# Altium PCB Power_Box_V0.PcbDoc (part 2 of 4)
Units mm, origin at the board's own origin, x right, y up, seen from the top; angles counter-clockwise.
Board outline 145 x 110 mm, 2 copper layers (Top Layer, Bottom Layer); 400 components, 300 nets, 1205 pads, 270 vias.
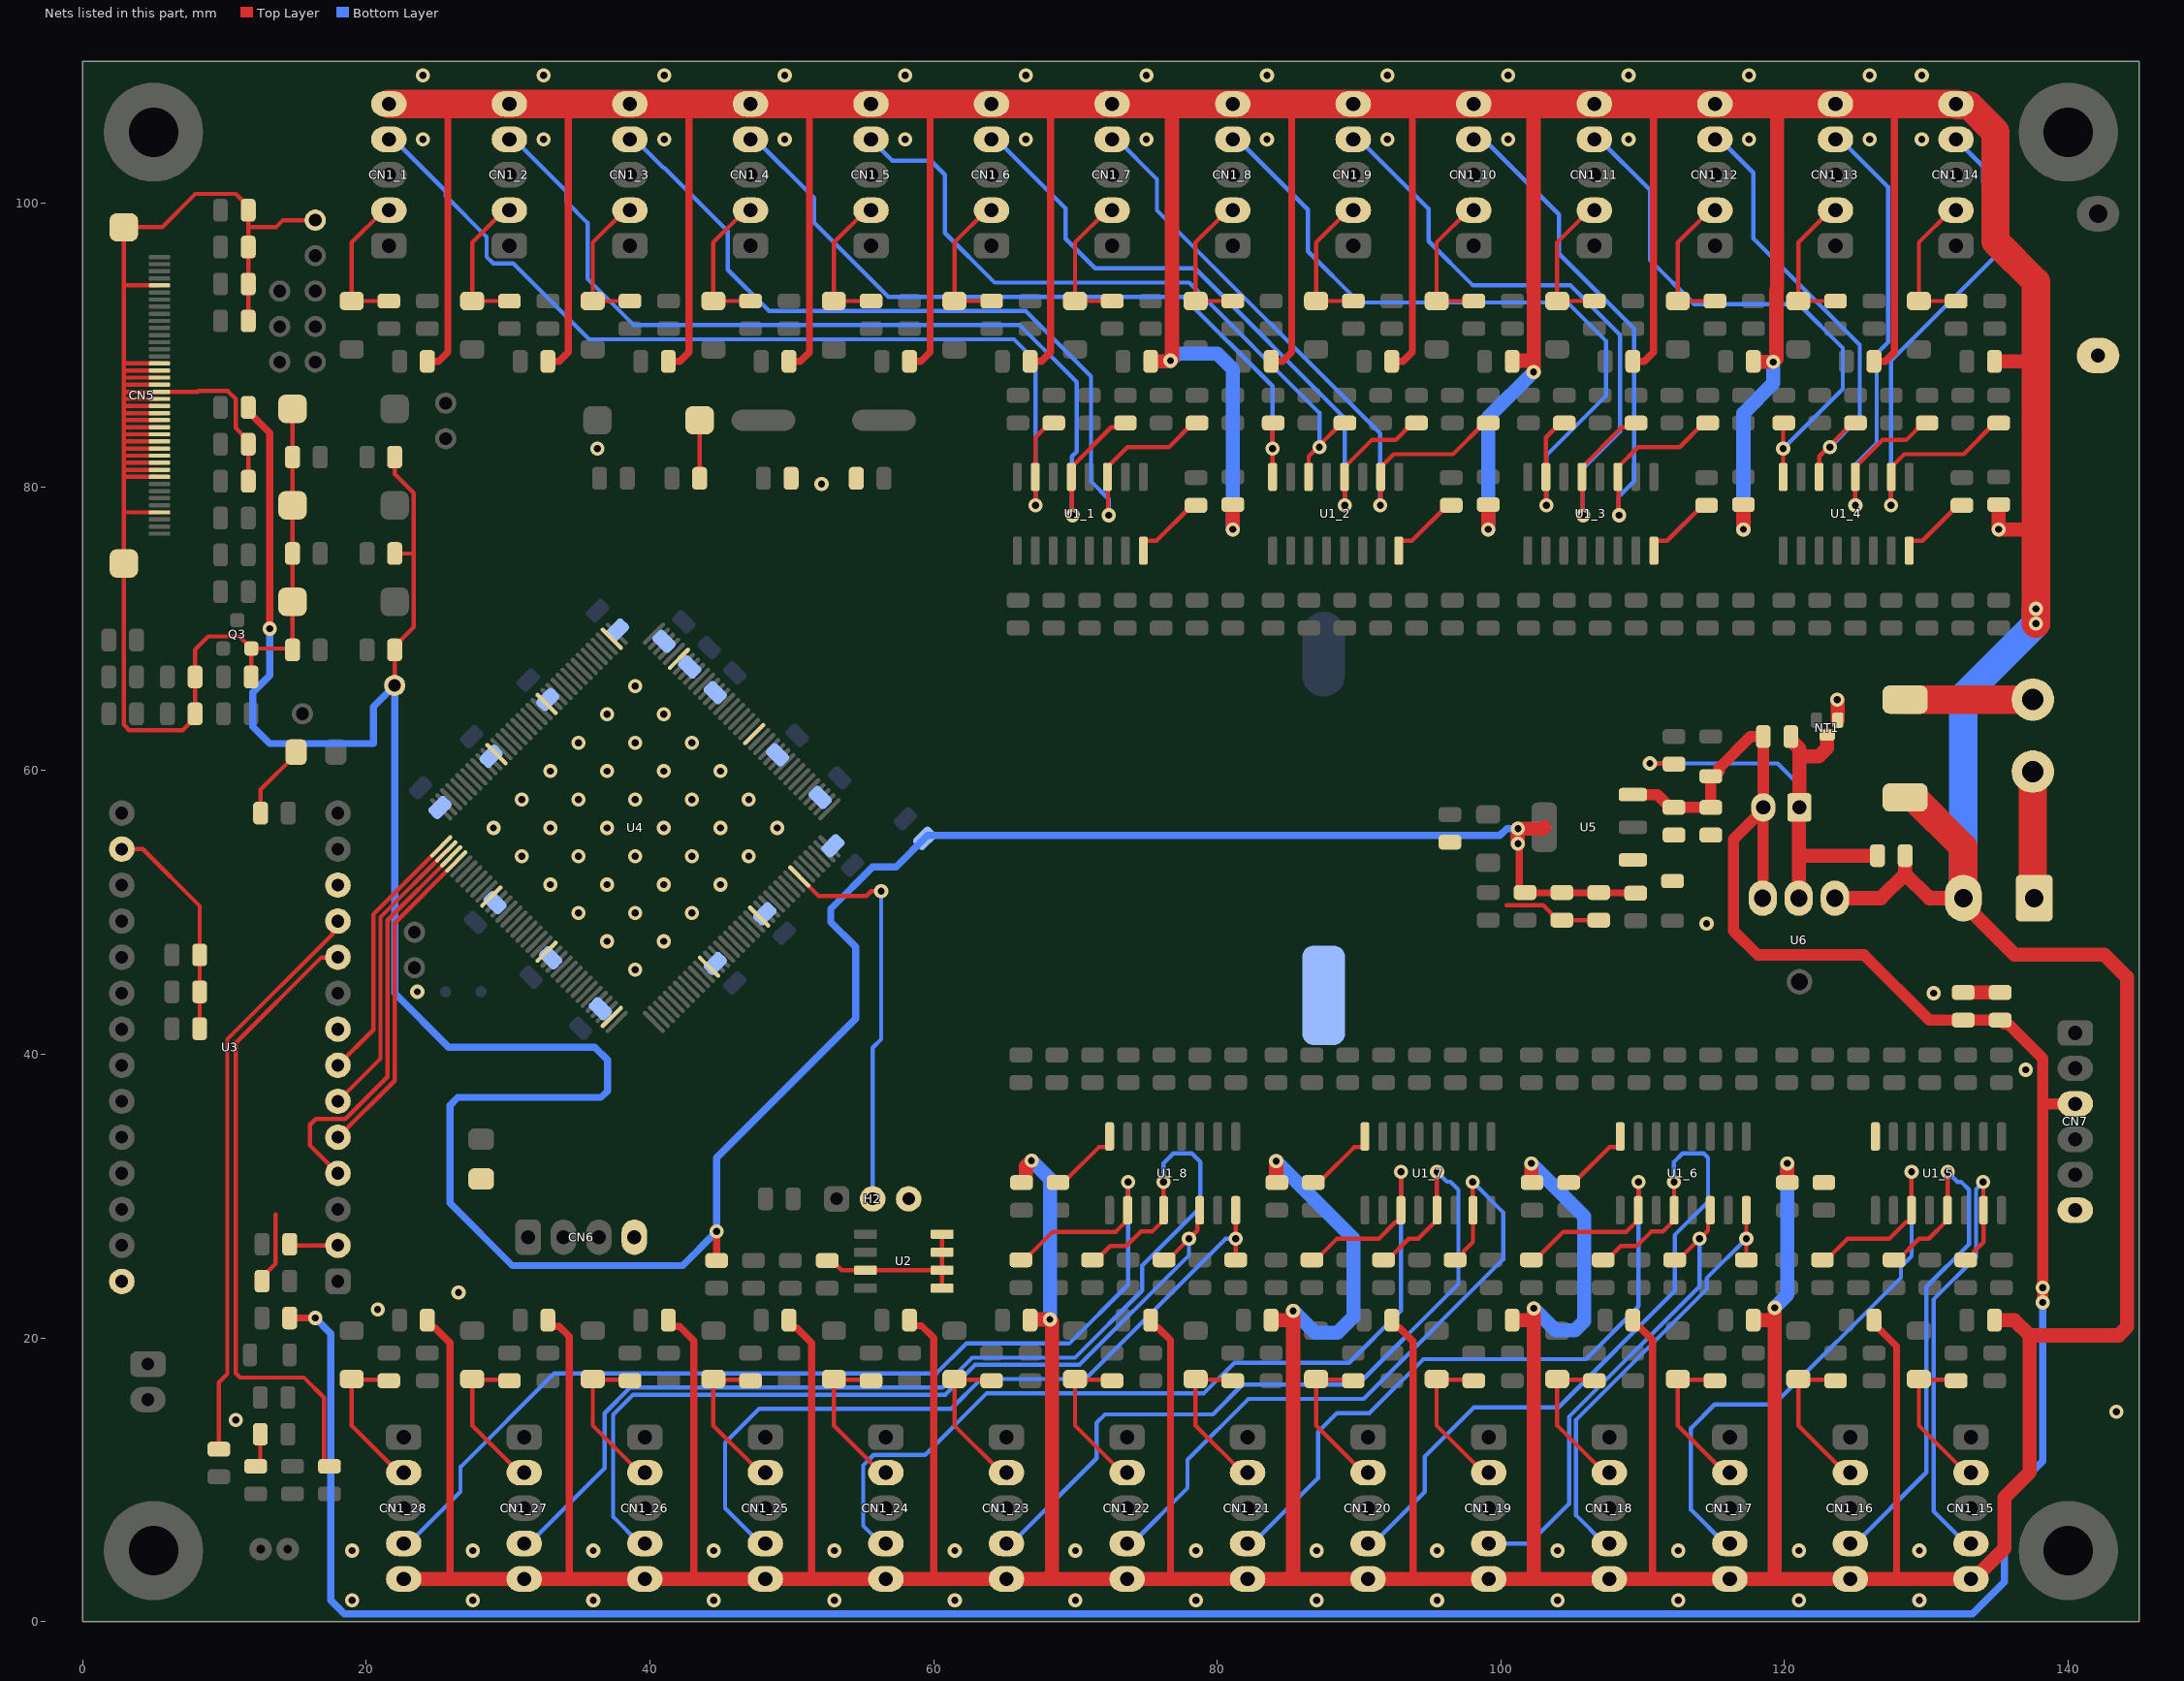
[diagram p2: the nets of this part, all layers, seen from the top]

## Components (designator, comment, footprint, x,y, rotation, side; value= is the part's Value field where it differs from the comment) (continued)
ZD1_21 "Zener -3.3V-SMD" SOD80 78.468,18.8 r270 top (schematic designator ZD1)
ZD1_22 "Zener -3.3V-SMD" SOD80 69.968,18.8 r270 top (schematic designator ZD1)
ZD1_23 "Zener -3.3V-SMD" SOD80 61.468,18.8 r270 top (schematic designator ZD1)
ZD1_24 "Zener -3.3V-SMD" SOD80 52.968,18.8 r270 top (schematic designator ZD1)
ZD1_25 "Zener -3.3V-SMD" SOD80 44.468,18.8 r270 top (schematic designator ZD1)
ZD1_26 "Zener -3.3V-SMD" SOD80 35.968,18.8 r270 top (schematic designator ZD1)
ZD1_27 "Zener -3.3V-SMD" SOD80 27.468,18.8 r270 top (schematic designator ZD1)
ZD1_28 "Zener -3.3V-SMD" SOD80 18.968,18.8 r270 top (schematic designator ZD1)

## Footprints (in the part's own frame and the unit in brackets; to place one, negate y for a bottom-side part, rotate by r counter-clockwise, add the part's x,y. Pads: shape width x height; smd on the part's side, far side on the other; paste and mask are expansions set on the pad)
BAT-HOLDER-SMD-3V [mm]
  oval 3x6 smd: 1(0,12.025)
  rrect50% 3x7 smd: 2(0,-12.025)
  silkscreen extent -10.81,-12.65 10.81,8.82, body extent -7.85,-12.87 7.85,12.52, height 5.4
C-0805 [mm]
  rrect50% 1.05x1.6 smd: 1(-0.975,0) 2(0.975,0)
  silkscreen extent -1.71,-1.01 1.71,1.01, body extent -1.03,-0.63 0.97,0.63, height 0.61
CAP-CER-13x5-Ls10 [mm] "P2P : 10mm"
  oval 2.5x3 hole 1.3: 1(-5,0)
  oval 2.5x3 hole 1: 2(5,0)
  silkscreen extent -6.47,-2.49 6.48,2.51, body extent -6,-2.5 6,2.5, height 15.98
CAP-Elec-6.3x12 [mm] "P2P : 2.54mm"
  oval 1.7x2 hole 1: 1(-1.27,0)
  rrect25% 1.7x2 hole 1: 2(1.27,0)
  silkscreen extent -3.3,-3.3 3.3,3.3, body extent -3.18,-3.15 3.13,3.15, height 12.71
CAP-Elec-10x25-5 [mm] "P2P : 5mm"
  oval 2.6x3.3 hole 1.3: 1(-2.5,0)
  rrect25% 2.6x3.3 hole 1.3: 2(2.5,0)
  silkscreen extent -5.19,-5.2 5.2,5.2, body extent -5,-5 5,5, height 25.2
CN-FPC-40-0.5mm-hor [mm]
  rrect50% 0.3x1.5 smd: 1(-9.75,1.258) 2(-9.25,1.258) 3(-8.75,1.258) 4(-8.25,1.258) 5(-7.75,1.258) 6(-7.25,1.258) 7(-6.75,1.258) 8(-6.25,1.258) 9(-5.75,1.258) 10(-5.25,1.258) 11(-4.75,1.258) 12(-4.25,1.258) 13(-3.75,1.258) 14(-3.25,1.258) 15(-2.75,1.258) 16(-2.25,1.258) 17(-1.75,1.258) 18(-1.25,1.258) 19(-0.75,1.258) 20(-0.25,1.258) 21(0.25,1.258) 22(0.75,1.258) 23(1.25,1.258) 24(1.75,1.258) 25(2.25,1.258) 26(2.75,1.258) 27(3.25,1.258) 28(3.75,1.258) 29(4.25,1.258) 30(4.75,1.258) 31(5.25,1.258) 32(5.75,1.258) 33(6.25,1.258) 34(6.75,1.258) 35(7.25,1.258) 36(7.75,1.258) 37(8.25,1.258) 38(8.75,1.258) 39(9.25,1.258) 40(9.75,1.258)
  rrect50% 2x2 smd: 41(-11.85,-1.257) 42(11.85,-1.257)
  silkscreen extent -12.7,-3.82 12.7,2.16, body extent -12.75,-3.86 12.75,1.54, height 2.12
CRYSTAL-SMD [mm]
  oval 4.5x1.5 smd: 1(-4.25,0) 2(4.25,0)
  silkscreen extent -5.75,-2.5 5.75,2.5, body extent -6.21,-2.25 6.09,2.25, height 5.18
D-DO214 [mm]
  rrect50% 2x3.2 smd: 1(3.425,0) 2(-3.475,0)
  silkscreen extent -4.72,-3.3 4.68,3.3, body extent -4.06,-3.15 4.06,3.15
DIP28-wide [mm]
  rrect50% 1.8x1.8 hole 0.9: 1(-7.62,16.51)
  round 1.8 hole 0.9: 2(-7.62,13.97) 3(-7.62,11.43) 4(-7.62,8.89) 5(-7.62,6.35) 6(-7.62,3.81) 7(-7.62,1.27) 8(-7.62,-1.27) 9(-7.62,-3.81) 10(-7.62,-6.35) 11(-7.62,-8.89) 12(-7.62,-11.43) 13(-7.62,-13.97) 14(-7.62,-16.51) 15(7.62,-16.51) 16(7.62,-13.97) 17(7.62,-11.43) 18(7.62,-8.89) 19(7.62,-6.35) 20(7.62,-3.81) 21(7.62,-1.27) 22(7.62,1.27) 23(7.62,3.81) 24(7.62,6.35) 25(7.62,8.89) 26(7.62,11.43) 27(7.62,13.97) 28(7.62,16.51)
  silkscreen extent -6.45,-18.1 6.45,18.41, body extent -7.65,-17.88 7.65,17.92, height 5.01
FB-0805 [mm]
  rrect50% 1.05x1.6 smd: 1(-0.975,0) 2(0.975,0)
  silkscreen extent -1.5,-1 1.5,1, body extent -1,-0.63 1,0.63, height 0.84
H-3pin-M-S [mm]
  rrect50% 1.8x1.8 hole 0.9: 1(-2.54,0)
  round 1.8 hole 0.9: 2(0,0) 3(2.54,0)
  silkscreen extent -3.81,-1.27 3.81,1.27, body extent -3.79,-1.25 3.79,1.25, height 8.6
KF129-2pin [mm] "P2P : 5.08mm"
  round 3 hole 1.5: 1(-2.54,0) 2(2.54,0)
  silkscreen extent -5,-4.5 5,4.5, body extent -5.28,-5.03 5.28,4.97, height 14.2
LED-1206-G [mm]
  rrect50% 1x1.6 smd: 1(1.4,0) 2(-1.4,0)
  silkscreen extent -2.11,-1 2.08,1, body extent -1.6,-0.8 1.6,0.8, height 1.1
LED-1206-R [mm]
  rrect50% 1x1.6 smd: 1(1.4,0) 2(-1.4,0)
  silkscreen extent -2.11,-1 2.08,1, body extent -1.6,-0.8 1.6,0.8, height 1.1
LED-1206-Y [mm]
  rrect50% 1x1.6 smd: 1(1.4,0) 2(-1.4,0)
  silkscreen extent -2.11,-1 2.08,1, body extent -1.6,-0.8 1.6,0.8, height 1.11
MIC-2.2mm [mm]
  round 1.6 hole 0.6: 1(0.95,0) 2(-0.95,0)
  silkscreen extent -3.49,-4.5 3.51,2.5, body extent -2.99,-3.99 3,2, height 2.35
"NET TIE-3" [mm]
  rrect50% 0.8x1.1 smd: 1(-0.75,-0.525) 3(0.75,-0.525)
  rrect50% 1.1x0.8 smd: 2(0,0.525)
  Top Layer region: -0.8,-1.075 0.8,-1.075 0.8,0.025 -0.8,0.025
  Top Layer region: -0.55,-0.325 0.55,-0.325 0.55,0.55 -0.55,0.55
R-0805 [mm]
  rrect50% 1.05x1.6 smd: 1(-0.975,0) 2(0.975,0)
  silkscreen extent -1.71,-1.01 1.71,1.01, body extent -1,-0.63 1,0.63, height 0.44
SB-ARC [mm]
  round 0.025 smd mask+0.1: 1(-0.4,0)
  round 0.8 smd mask+0.1: 2(0.4,0)
  Top Layer region: 0.371,-0.495 0.159,-0.48 -0.027,-0.378 -0.155,-0.208 -0.2,0 -0.2,0 -0.155,0.208 -0.027,0.378 0.159,0.48 0.371,0.495 0.371,0.495 0.437,0.5 0.496,0.532 0.536,0.585 0.55,0.65 0.55,0.65 0.531,0.746 0.477,0.827 0.396,0.881 0.3,0.9 0.3,0.9 -0.044,0.831 -0.336,0.636 -0.532,0.344 -0.6,0 -0.6,0 -0.531,-0.344 -0.336,-0.636 -0.044,-0.831 0.3,-0.9 0.3,-0.9 0.425,-0.867 0.517,-0.775 0.55,-0.65 0.55,-0.65 0.536,-0.585 0.496,-0.532 0.437,-0.5 0.371,-0.495
Screw_M3 [mm] "H : 3.5mm"
  round 7 hole 3.5: 1(0,0)
  silkscreen extent -3.73,-3.73 3.73,3.73, body extent -2.79,-2.8 2.79,2.8, height 2.4
SOD80 [mm]
  rrect50% 1.3x1.7 smd: 1(1.7,0) 2(-1.7,0)
  silkscreen extent -2.55,-1.1 2.55,1.1, body extent -1.88,-0.79 1.82,0.79, height 1.6
SOIC8 [mm]
  rrect25% 1.6x0.65 smd: 1(-2.7,1.905) 2(-2.7,0.635) 3(-2.7,-0.635) 4(-2.7,-1.905) 5(2.7,-1.905) 6(2.7,-0.635) 7(2.7,0.635) 8(2.7,1.905)
  silkscreen extent -3.38,-2.54 3.38,2.54, body extent -3.01,-2.45 2.99,2.45, height 1.75
SOIC16 [mm]
  rrect50% 2x0.625 smd: 1(-2.6,4.445) 2(-2.6,3.175) 3(-2.6,1.905) 4(-2.6,0.635) 5(-2.6,-0.635) 6(-2.6,-1.905) 7(-2.6,-3.175) 8(-2.6,-4.445) 9(2.6,-4.445) 10(2.6,-3.175) 11(2.6,-1.905) 12(2.6,-0.635) 13(2.6,0.635) 14(2.6,1.905) 15(2.6,3.175) 16(2.6,4.445)
  silkscreen extent -3.45,-5.01 3.45,5.01, body extent -3.03,-4.95 3.17,4.95, height 1.7
SOT23-213 [mm]
  rrect50% 1x1 smd mask+0.07: 1(1,-1) 2(-1,-1) 3(0,1)
  silkscreen extent -1.61,-1 1.61,0.79, body extent -1.5,-1.25 1.5,1.25, height 1.09
SOT223 [mm]
  rrect50% 0.95x2 smd: 1(-2.3,-3.204) 2(0,-3.204) 3(2.3,-3.204)
  rrect50% 3.5x1.8 smd: 4(0,3.048)
  silkscreen extent -3.25,-3.4 3.25,3.81, body extent -3.15,-3.48 3.15,3.52, height 1.6
STM-LQFP144_M [mm] "Thin QFP, 144-Leads, Body 20x20mm, Pitch 0.5mm, IPC Low Density"
  oval 2.1x0.3 smd: 1(-10.6,8.75) 2(-10.6,8.25) 3(-10.6,7.75) 4(-10.6,7.25) 5(-10.6,6.75) 6(-10.6,6.25) 7(-10.6,5.75) 8(-10.6,5.25) 9(-10.6,4.75) 10(-10.6,4.25) 11(-10.6,3.75) 12(-10.6,3.25) 13(-10.6,2.75) 14(-10.6,2.25) 15(-10.6,1.75) 16(-10.6,1.25) 17(-10.6,0.75) 18(-10.6,0.25) 19(-10.6,-0.25) 20(-10.6,-0.75) 21(-10.6,-1.25) 22(-10.6,-1.75) 23(-10.6,-2.25) 24(-10.6,-2.75) 25(-10.6,-3.25) 26(-10.6,-3.75) 27(-10.6,-4.25) 28(-10.6,-4.75) 29(-10.6,-5.25) 30(-10.6,-5.75) 31(-10.6,-6.25) 32(-10.6,-6.75) 33(-10.6,-7.25) 34(-10.6,-7.75) 35(-10.6,-8.25) 36(-10.6,-8.75) 73(10.6,-8.75) 74(10.6,-8.25) 75(10.6,-7.75) 76(10.6,-7.25) 77(10.6,-6.75) 78(10.6,-6.25) 79(10.6,-5.75) 80(10.6,-5.25) 81(10.6,-4.75) 82(10.6,-4.25) 83(10.6,-3.75) 84(10.6,-3.25) 85(10.6,-2.75) 86(10.6,-2.25) 87(10.6,-1.75) 88(10.6,-1.25) 89(10.6,-0.75) 90(10.6,-0.25) 91(10.6,0.25) 92(10.6,0.75) 93(10.6,1.25) 94(10.6,1.75) 95(10.6,2.25) 96(10.6,2.75) 97(10.6,3.25) 98(10.6,3.75) 99(10.6,4.25) 100(10.6,4.75) 101(10.6,5.25) 102(10.6,5.75) 103(10.6,6.25) 104(10.6,6.75) 105(10.6,7.25) 106(10.6,7.75) 107(10.6,8.25) 108(10.6,8.75)
  oval 0.3x2.1 smd: 37(-8.75,-10.6) 38(-8.25,-10.6) 39(-7.75,-10.6) 40(-7.25,-10.6) 41(-6.75,-10.6) 42(-6.25,-10.6) 43(-5.75,-10.6) 44(-5.25,-10.6) 45(-4.75,-10.6) 46(-4.25,-10.6) 47(-3.75,-10.6) 48(-3.25,-10.6) 49(-2.75,-10.6) 50(-2.25,-10.6) 51(-1.75,-10.6) 52(-1.25,-10.6) 53(-0.75,-10.6) 54(-0.25,-10.6) 55(0.25,-10.6) 56(0.75,-10.6) 57(1.25,-10.6) 58(1.75,-10.6) 59(2.25,-10.6) 60(2.75,-10.6) 61(3.25,-10.6) 62(3.75,-10.6) 63(4.25,-10.6) 64(4.75,-10.6) 65(5.25,-10.6) 66(5.75,-10.6) 67(6.25,-10.6) 68(6.75,-10.6) 69(7.25,-10.6) 70(7.75,-10.6) 71(8.25,-10.6) 72(8.75,-10.6) 109(8.75,10.6) 110(8.25,10.6) 111(7.75,10.6) 112(7.25,10.6) 113(6.75,10.6) 114(6.25,10.6) 115(5.75,10.6) 116(5.25,10.6) 117(4.75,10.6) 118(4.25,10.6) 119(3.75,10.6) 120(3.25,10.6) 121(2.75,10.6) 122(2.25,10.6) 123(1.75,10.6) 124(1.25,10.6) 125(0.75,10.6) 126(0.25,10.6) 127(-0.25,10.6) 128(-0.75,10.6) 129(-1.25,10.6) 130(-1.75,10.6) 131(-2.25,10.6) 132(-2.75,10.6) 133(-3.25,10.6) 134(-3.75,10.6) 135(-4.25,10.6) 136(-4.75,10.6) 137(-5.25,10.6) 138(-5.75,10.6) 139(-6.25,10.6) 140(-6.75,10.6) 141(-7.25,10.6) 142(-7.75,10.6) 143(-8.25,10.6) 144(-8.75,10.6)
  silkscreen extent -10.72,-9.15 9.15,9.57, body extent -10,-10 10,10, height 1.6
SW-SMD-2pin-3x6 [mm]
  rrect50% 2x2 smd: 1(-3.6,0) 2(3.6,0)
  silkscreen extent -2.11,-1.27 2.11,1.33, body extent -4,-1.8 4,1.8, height 2.5
TAN-A [mm]
  rrect50% 1.5x1.8 smd: 1(-1.4,0) 2(1.4,0)
  silkscreen extent -2.35,-1.1 2.35,1.1, body extent -1.7,-0.84 1.7,0.84, height 1.71
"TEST POINT-DIP" [mm]
  round 1.5 hole 0.9: 1(0,0)
  silkscreen extent -0.95,-0.95 0.95,0.95
TO220-HEARSINK-1 [mm]
  oval 2x2.5 hole 1.2: 1(-2.54,-2.95) 2(0,-2.95) 3(2.54,-2.95)
  round 1.8 hole 1.2: 4(-0.05,2.95)
  silkscreen extent -7.35,-4.35 7.27,5.23, body extent -7.5,-4.45 7.4,5.35, height 21.1
XH-2 [mm]
  rrect50% 1.8x2.5 hole 0.9: 1(-1.25,0)
  oval 1.8x2.5 hole 0.9: 2(1.25,0)
  silkscreen extent -3.68,-3.4 3.68,2.41, body extent -3.69,-3.4 3.71,2.35, height 7
XH-4 [mm]
  rrect50% 1.8x2.5 hole 1: 1(-3.75,0)
  oval 1.8x2.5 hole 1: 2(-1.25,0) 3(1.25,0) 4(3.75,0)
  silkscreen extent -6.2,-3.4 6.25,2.35, body extent -6.2,-3.4 6.2,2.35, height 7.05
XH-5 [mm]
  rrect50% 1.8x2.5 hole 1: 1(-5,0)
  oval 1.8x2.5 hole 1: 2(-2.5,0) 3(0,0) 4(2.5,0) 5(5,0)
  silkscreen extent -7.45,-3.4 7.45,2.35, body extent -7.45,-3.39 7.45,2.36, height 7.1
XH-6 [mm]
  rrect50% 1.8x2.5 hole 1: 1(-6.25,0)
  oval 1.8x2.5 hole 1: 2(-3.75,0) 3(-1.25,0) 4(1.25,0) 5(3.75,0) 6(6.25,0)
  silkscreen extent -8.7,-3.4 8.7,2.35, body extent -8.7,-3.38 8.7,2.37, height 7.1

## Part data
BAT1: library part "BATTERY HOLDER", "BATTERY", Voltage=3V, ComponentLink1Description=Linkedin, ComponentLink1URL=https://ir.linkedin.com/in/mahdi-bagherzade, Phone Number="0915 8700 314", Published Date=9-15-2024, Publisher="Mahdi Bagherzadeh", Size=2016, Type=SMD
C1_1 C1_2 C1_3 C2_1 C2_2 C2_3 C2_4 C2_5 C2_6 C2_7 C2_8 C2_9 C2_10 C2_11 C2_12 C2_13 C2_14 C2_15 C2_16 C2_17 C2_18 C2_19 C2_20 C2_21 C2_22 C2_23 C2_24 C2_25 C2_26 C2_27 C2_28 C3 C4 C5 C6 C7 C8 C9 C10 C11 C12 C13 C14 C15 C16 C17 C18 C19 C20 C21 C22 C23 C24 C25 C26 C27 C28 C29 C30 C31 C32 C33 C34 C36 C37 C38 C39 C41 C44 C45 C47_1 C47_2 C47_3 C47_4 C47_5 C47_6 C47_7 C47_8 C48 C49: library part CAP-CER, "CAPACITOR", Tolerance=X7R, Voltage=50V, ComponentLink1Description=Linkedin, ComponentLink1URL=https://ir.linkedin.com/in/mahdi-bagherzade, Phone Number="0915 8700 314", Published Date=9-15-2024, Publisher="Mahdi Bagherzadeh", Type=SMD
C35 C40: library part CAP-TAN, "CAPACITOR", Power=-, Voltage=16V, ComponentLink1Description=Linkedin, ComponentLink1URL=https://ir.linkedin.com/in/mahdi-bagherzade, Phone Number="0915 8700 314", Published Date=9-15-2024, Publisher="Mahdi Bagherzadeh", Size=A, Tolerance=-
C42: library part CAP-ELEC, "CAPACITOR", Voltage=25V, ComponentLink1Description=Linkedin, ComponentLink1URL=https://ir.linkedin.com/in/mahdi-bagherzade, Phone Number="0915 8700 314", Published Date=9-15-2024, Publisher="Mahdi Bagherzadeh", Size=10x25, Type=THD
C43: library part CAP-ELEC, "CAPACITOR", Voltage=10V, ComponentLink1Description=Linkedin, ComponentLink1URL=https://ir.linkedin.com/in/mahdi-bagherzade, Phone Number="0915 8700 314", Published Date=9-15-2024, Publisher="Mahdi Bagherzadeh", Size=10x25, Type=THD
C46: library part CAP-CER, "CAPACITOR", Tolerance=X7R, Voltage=1KV, ComponentLink1Description=Linkedin, ComponentLink1URL=https://ir.linkedin.com/in/mahdi-bagherzade, Phone Number="0915 8700 314", Published Date=9-15-2024, Publisher="Mahdi Bagherzadeh", Type=THD
CN1_1 CN1_2 CN1_3 CN1_4 CN1_5 CN1_6 CN1_7 CN1_8 CN1_9 CN1_10 CN1_11 CN1_12 CN1_13 CN1_14 CN1_15 CN1_16 CN1_17 CN1_18 CN1_19 CN1_20 CN1_21 CN1_22 CN1_23 CN1_24 CN1_25 CN1_26 CN1_27 CN1_28: library part CN-5pin, "CONNECTOR", ComponentLink1Description=Linkedin, ComponentLink1URL=https://ir.linkedin.com/in/mahdi-bagherzade, Phone Number="0915 8700 314", Published Date=9-15-2024, Publisher="Mahdi Bagherzadeh", Size=?mm, Type=Straight/Right-THD/SMD
CN4: library part CN-2pin, "CONNECTOR", ComponentLink1Description=Linkedin, ComponentLink1URL=https://ir.linkedin.com/in/mahdi-bagherzade, Phone Number="0915 8700 314", Published Date=9-15-2024, Publisher="Mahdi Bagherzadeh"
CN5: library part CN-FPC-40pin, "CONNECTOR", ComponentLink1Description=Linkedin, ComponentLink1URL=https://ir.linkedin.com/in/mahdi-bagherzade, Phone Number="0915 8700 314", Published Date=9-15-2024, Publisher="Mahdi Bagherzadeh"
CN6: library part CN-4pin, "CONNECTOR", ComponentLink1Description=Linkedin, ComponentLink1URL=https://ir.linkedin.com/in/mahdi-bagherzade, Phone Number="0915 8700 314", Published Date=9-15-2024, Publisher="Mahdi Bagherzadeh", Size=?mm, Type=Straight/Right-THD/SMD
CN7: library part CN-6pin, "CONNECTOR", ComponentLink1Description=Linkedin, ComponentLink1URL=https://ir.linkedin.com/in/mahdi-bagherzade, Phone Number="0915 8700 314", Published Date=9-15-2024, Publisher="Mahdi Bagherzadeh", Size=?mm, Type=Straight/Right-THD/SMD
D1 D4: library part DIODE, "DIODE", ComponentLink1Description=Linkedin, ComponentLink1URL=https://ir.linkedin.com/in/mahdi-bagherzade, Phone Number="0915 8700 314", Published Date=9-15-2024, Publisher="Mahdi Bagherzadeh", Type=SMD
  D1: Code=1N4148
  D4: Code=1N5408
FB1 FB6_1 FB6_2 FB6_3 FB6_4 FB6_5 FB6_6 FB6_7 FB6_8: library part "FERRITE BEAD", "INDUCATOR", ComponentLink1Description=Linkedin, ComponentLink1URL=https://ir.linkedin.com/in/mahdi-bagherzade, Phone Number="0915 8700 314", Published Date=9-15-2024, Publisher="Mahdi Bagherzadeh", Type=SMD
FB2 FB3 FB4 FB5: "INDUCATOR", ComponentLink1Description=Linkedin, ComponentLink1URL=https://ir.linkedin.com/in/mahdi-bagherzade, Phone Number="0915 8700 314", Published Date=9-15-2024, Publisher="Mahdi Bagherzadeh"
H2: library part HEADER-3pin, "HEADER", ComponentLink1Description=Linkedin, ComponentLink1URL=https://ir.linkedin.com/in/mahdi-bagherzade, Phone Number="0915 8700 314", Published Date=9-15-2024, Publisher="Mahdi Bagherzadeh", Type=MALE-STRAIGHT
LED2: library part LED, "LED", ComponentLink1Description=Linkedin, ComponentLink1URL=https://ir.linkedin.com/in/mahdi-bagherzade, Phone Number="0915 8700 314", Published Date=9-15-2024, Publisher="Mahdi Bagherzadeh"
LED3: library part LED, "LED", Color=RED, ComponentLink1Description=Linkedin, ComponentLink1URL=https://ir.linkedin.com/in/mahdi-bagherzade, Phone Number="0915 8700 314", Published Date=9-15-2024, Publisher="Mahdi Bagherzadeh", Size=0805
LED4: library part LED, "LED", Color=GREEN, ComponentLink1Description=Linkedin, ComponentLink1URL=https://ir.linkedin.com/in/mahdi-bagherzade, Phone Number="0915 8700 314", Published Date=9-15-2024, Publisher="Mahdi Bagherzadeh", Size=1206, Type=SMD
MIC1: library part MIC, "MIC", ComponentLink1Description=Linkedin, ComponentLink1URL=https://ir.linkedin.com/in/mahdi-bagherzade, Phone Number="0915 8700 314", Published Date=9-15-2024, Publisher="Mahdi Bagherzadeh"
Q3: library part S8050, "TRANSISTOR", ComponentLink1Description=Linkedin, ComponentLink1URL=https://ir.linkedin.com/in/mahdi-bagherzade, Phone Number="0915 8700 314", Published Date=9-15-2024, Publisher="Mahdi Bagherzadeh"
R1_1 R1_2 R1_3 R2 R3_1 R3_2 R3_3 R3_4 R3_5 R3_6 R3_7 R3_8 R4_1 R4_2 R4_3 R4_4 R4_5 R4_6 R4_7 R4_8 R5_1 R5_2 R5_3 R5_4 R5_5 R5_6 R5_7 R5_8 R6_1 R6_2 R6_3 R6_4 R6_5 R6_6 R6_7 R6_8 R7_1 R7_2 R7_3 R7_4 R7_5 R7_6 R7_7 R7_8 R7_9 R7_10 R7_11 R7_12 R7_13 R7_14 R7_15 R7_16 R7_17 R7_18 R7_19 R7_20 R7_21 R7_22 R7_23 R7_24 R7_25 R7_26 R7_27 R7_28 R8_1 R8_2 R8_3 R8_4 R8_5 R8_6 R8_7 R8_8 R8_9 R8_10 R8_11 R8_12 R8_13 R8_14 R8_15 R8_16 R8_17 R8_18 R8_19 R8_20 R8_21 R8_22 R8_23 R8_24 R8_25 R8_26 R8_27 R8_28 R9_1 R9_2 R9_3 R9_4 R9_5 R9_6 R9_7 R9_8 R10_1 R10_2 R10_3 R10_4 R10_5 R10_6 R10_7 R10_8 R28 R29 R30 R31_1 R31_2 R31_3 R31_4 R31_5 R31_6 R31_7 R31_8 R32_1 R32_2 R32_3 R32_4 R32_5 R32_6 R32_7 R32_8 R33_1 R33_2 R33_3 R33_4 R33_5 R33_6 R33_7 R33_8 R34_1 R34_2 R34_3 R34_4 R34_5 R34_6 R34_7 R34_8 R35_1 R35_2 R35_3 R35_4 R35_5 R35_6 R35_7 R35_8 R36_1 R36_2 R36_3 R36_4 R36_5 R36_6 R36_7 R36_8 R37 R38_1 R38_2 R38_3 R38_4 R38_5 R38_6 R38_7 R38_8 R39_1 R39_2 R39_3 R39_4 R39_5 R39_6 R39_7 R39_8: library part RES, "RESISTOR", Power=1/8W, Tolerance=5%, ComponentLink1Description=Linkedin, ComponentLink1URL=https://ir.linkedin.com/in/mahdi-bagherzade, Phone Number="0915 8700 314", Published Date=9-15-2024, Publisher="Mahdi Bagherzadeh"
  R2 R3_1 R3_2 R3_3 R3_4 R3_5 R3_6 R3_7 R3_8 R4_1 R4_2 R4_3 R4_4 R4_5 R4_6 R4_7 R4_8 R5_1 R5_2 R5_3 R5_4 R5_5 R5_6 R5_7 R5_8 R6_1 R6_2 R6_3 R6_4 R6_5 R6_6 R6_7 R6_8 R9_1 R9_2 R9_3 R9_4 R9_5 R9_6 R9_7 R9_8 R10_1 R10_2 R10_3 R10_4 R10_5 R10_6 R10_7 R10_8 R31_1 R31_2 R31_3 R31_4 R31_5 R31_6 R31_7 R31_8 R32_1 R32_2 R32_3 R32_4 R32_5 R32_6 R32_7 R32_8 R33_1 R33_2 R33_3 R33_4 R33_5 R33_6 R33_7 R33_8 R34_1 R34_2 R34_3 R34_4 R34_5 R34_6 R34_7 R34_8 R35_1 R35_2 R35_3 R35_4 R35_5 R35_6 R35_7 R35_8 R36_1 R36_2 R36_3 R36_4 R36_5 R36_6 R36_7 R36_8 R37 R38_1 R38_2 R38_3 R38_4 R38_5 R38_6 R38_7 R38_8 R39_1 R39_2 R39_3 R39_4 R39_5 R39_6 R39_7 R39_8: Type=SMD
R11 R12 R13 R14 R15 R16 R17 R18 R19 R20 R21 R22 R23 R24 R25 R26 R27: library part RES, "RESISTOR", ComponentLink1Description=Linkedin, ComponentLink1URL=https://ir.linkedin.com/in/mahdi-bagherzade, Phone Number="0915 8700 314", Published Date=9-15-2024, Publisher="Mahdi Bagherzadeh"
S1_1 S1_2 S1_3 S2: library part "PUSH BUTTON", "SWITCH", ComponentLink1Description=Linkedin, ComponentLink1URL=https://ir.linkedin.com/in/mahdi-bagherzade, Phone Number="0915 8700 314", Published Date=9-15-2024, Publisher="Mahdi Bagherzadeh"
  S1_1 S1_2 S1_3: Size=6x6
  S2: Size=3x6mm-2Pin
SC1 SC2 SC3 SC4: library part SCREW, "SCREW", ComponentLink1Description=Linkedin, ComponentLink1URL=https://ir.linkedin.com/in/mahdi-bagherzade, Phone Number="0915 8700 314", Published Date=9-15-2024, Publisher="Mahdi Bagherzadeh", Size=3mm
TP1 TP2 TP3 TP4 TP5 TP6 TP7 TP8 TP9 TP10 TP11 TP12 TP13 TP14: library part "TEST PIONT", ComponentLink1Description=Linkedin, ComponentLink1URL=https://ir.linkedin.com/in/mahdi-bagherzade, Phone Number="0915 8700 314", Published Date=9-15-2024, Publisher="Mahdi Bagherzadeh"
TR1: library part TEMINAL-2pin, "TERMINAL", Code=KF?/Phoenix-2Pin, ComponentLink1Description=Linkedin, ComponentLink1URL=https://ir.linkedin.com/in/mahdi-bagherzade, Phone Number="0915 8700 314", Published Date=9-15-2024, Publisher="Mahdi Bagherzadeh", Size=?mm, Type=Straight/Right
U1_1 U1_2 U1_3 U1_4 U1_5 U1_6 U1_7 U1_8 U2 U3: "IC", ComponentLink1Description=Linkedin, ComponentLink1URL=https://ir.linkedin.com/in/mahdi-bagherzade, Phone Number="0915 8700 314", Published Date=9-15-2024, Publisher="Mahdi Bagherzadeh"
U4: "ARM Cortex-M4 32-bit MCU+FPU, 210 DMIPS, 1024 kB Flash, 192 kB Internal RAM, 114 I/Os, 144-pin LQFP, -40 to 85 degC, Tray", I/Os (High Current)=114, Manufacturer=STMicroelectronics, Operating Frequency(F) (Processor speed) (MHz)=168, Supplier Part Number 1=497-11766-ND, Supply Voltage(Vcc) max (V)=3.6, Supply Voltage(Vcc) min (V)=1.8, ComponentLink1Description="Manufacturer URL", ComponentLink1URL=http://www.st.com/web/en/home.html, ComponentLink2Description=Datasheet, ComponentLink2URL=http://www.st.com/st-web-ui/static/active/en/resource/technical/document/datasheet/DM00037051.pdf, ComponentLink3Description="Package Specification", ComponentLink3URL=http://www.st.com/st-web-ui/static/active/en/resource/technical/document/datasheet/DM00037051.pdf, Core="ARM Cortex-M4", D/A Converter=2x12-bit, DatasheetVersion="Rev. 4", FLASH Size (Prog) (kB)=1024, Internal RAM Size (kB)=192, Mounting Technology="Surface Mount", PackageDescription="144-Pin Low Profile Quad Flat Package, 20 x 20 mm Body, 0.5 mm Pitch", PackageReference=LQFP144, PackageVersion="Rev. 4, 06/2013", Packing=Tray, PartNumber=STM32F407ZGT6, Supplier 1=Digi-Key, Supplier 2=Newark, Supplier 3=Mouser, Supplier Part Number 2=73T2334, Supplier Part Number 3=511-STM32F407ZGT6
U5: library part AMS1117, "REGULATOR", Voltage=?V, ComponentLink1Description=Linkedin, ComponentLink1URL=https://ir.linkedin.com/in/mahdi-bagherzade, Phone Number="0915 8700 314", Published Date=9-15-2024, Publisher="Mahdi Bagherzadeh"
U6: library part 78Mxx, "REGULATOR", Voltage=5V, Code=7805, ComponentLink1Description=Linkedin, ComponentLink1URL=https://ir.linkedin.com/in/mahdi-bagherzade, Phone Number="0915 8700 314", Published Date=9-15-2024, Publisher="Mahdi Bagherzadeh", Type=THD
Y2: library part CRYSTAL, "CRYSTAL", ComponentLink1Description=Linkedin, ComponentLink1URL=https://ir.linkedin.com/in/mahdi-bagherzade, Phone Number="0915 8700 314", Published Date=9-15-2024, Publisher="Mahdi Bagherzadeh"
ZD1_1 ZD1_2 ZD1_3 ZD1_4 ZD1_5 ZD1_6 ZD1_7 ZD1_8 ZD1_9 ZD1_10 ZD1_11 ZD1_12 ZD1_13 ZD1_14 ZD1_15 ZD1_16 ZD1_17 ZD1_18 ZD1_19 ZD1_20 ZD1_21 ZD1_22 ZD1_23 ZD1_24 ZD1_25 ZD1_26 ZD1_27 ZD1_28: library part DIODE-ZENER, "DIODE", Power=Minimelf, Voltage=3.3V, ComponentLink1Description=Linkedin, ComponentLink1URL=https://ir.linkedin.com/in/mahdi-bagherzade, Phone Number="0915 8700 314", Published Date=9-15-2024, Publisher="Mahdi Bagherzadeh", Type=SMD
NT1 SB3 SB4: ComponentLink1Description=Linkedin, ComponentLink1URL=https://ir.linkedin.com/in/mahdi-bagherzade, Phone Number="0915 8700 314", Published Date=9-15-2024, Publisher="Mahdi Bagherzadeh"

## Via types
v1: diameter 1, hole 0.5, Top Layer to Bottom Layer, 270 vias

## Nets (pads, with @x,y where several pads share a name; then routed paths per layer and width w, separated by ;. In a path a pad name is that pad's centre, name@x,y a point inside that pad or via, vN(x,y) a via of type N, cw(c..) or ccw(c..) an arc to the next point about the centre after c; other vN are vias at no path point)
+3V3: C38.1 C39.1 FB1.1 FB2.2 FB4.1 FB5.1 R1_1.1 R1_2.1 R1_3.1 R30.1 TP2.1 | length 232.8
  Top Layer w0.3: TP2.1@22,66 R1_3.1@22,68.5 22,68.775 23.35,70.125 23.35,75.4 ; R1_2.1@22,75.3 23.25,75.3 23.35,75.4 ; R1_1.1@22,82.1 22,80.902 23.35,79.552 23.35,75.4
  Top Layer w0.5: FB4.1@11.675,85.6 11.675,85.325 13.2,83.8 v1(13.2,70) ; FB2.2@44.7,25.45 v1(44.7,27.5) ; v1(101.2,54.85) 101.296,54.754 101.296,51.674 101.57,51.4 FB1.1@101.7,51.4 101.725,51.375 109.475,51.375 R30.1@109.5,51.35
  Top Layer w1: v1(101.2,54.85) v1(101.2,55.9) 102.948,55.9 103.048,56
  Bottom Layer w0.5: v1(13.2,70) 13.2,66.7 12,65.5 12,63.1 13.2,61.9 20.5,61.9 20.5,64.5 TP2.1@22,66 22,44.3 25.8,40.5 36.1,40.5 37,39.6 37,37.4 36.55,36.95 26.45,36.95 25.9,36.4 25.9,29.5 30.3,25.1 42.3,25.1 v1(44.7,27.5) 44.7,32.7 54.5,42.5 54.5,47.556 52.75,49.306 52.75,50.25 55.7,53.2 57.358,53.2 59.573,55.416 99.931,55.416 100.416,55.9 v1(101.2,55.9)
  Bottom Layer w1: v1(101.2,54.85) v1(101.2,55.9)
+5: C36.1 C37.1 C43.1 C45.1 C48.1 C49.1 CN7.3 FB3.1 LED4.1 U5.3 U6.3 | length 242.4
  Top Layer w0.5: FB3.1@14.6,21.4 v1(16.4,21.4)
  Top Layer w0.8: U5.3@109.3,58.3 111.025,58.3 111.925,57.4 C37.1@112.2,57.4 C36.1@114.8,57.4 LED4.1@114.8,59.6 115.046,59.6 115.388,59.942 115.388,60.188 117.6,62.4 C45.1@118.5,62.4 C43.1@118.5,57.4 ; U6.3@118.46,51 118.48,51.02 C43.1@118.48,57.23 ; v1(138.2,22.5) v1(138.2,23.55) 138.2,36.5 ; CN7.3@140.5,36.5 138.2,36.5 ; C43.1@118.48,57.23 118.48,57.38 C43.1@118.5,57.4 ; C43.1@118.48,57.23 118.5,57.25 C43.1@118.5,57.4 ; C43.1@118.48,57.23 116.4,55.15 116.4,48.7 118.1,47 125.6,47 130.2,42.4 C49.1@132.6,42.4 C48.1@135.2,42.4 135.467,42.133 135.767,42.133 138.2,39.7 138.2,36.5
  Bottom Layer w0.5: v1(16.4,21.4) 17.5,20.3 17.5,1.5 18.45,0.55 133.25,0.55 135.5,2.8 135.5,8.6 138.2,11.3 v1(138.2,22.5) v1(138.2,23.55)
+12: C42.1 C44.1 CN1_1.5 CN1_2.5 CN1_3.5 CN1_4.5 CN1_5.5 CN1_6.5 CN1_7.5 CN1_8.5 CN1_9.5 CN1_10.5 CN1_11.5 CN1_12.5 CN1_13.5 CN1_14.5 CN1_15.5 CN1_16.5 CN1_17.5 CN1_18.5 CN1_19.5 CN1_20.5 CN1_21.5 CN1_22.5 CN1_23.5 CN1_24.5 CN1_25.5 CN1_26.5 CN1_27.5 CN1_28.5 D4.2 FB6_1.1 FB6_2.1 FB6_3.1 FB6_4.1 FB6_5.1 FB6_6.1 FB6_7.1 FB6_8.1 R7_1.1 R7_2.1 R7_3.1 R7_4.1 R7_5.1 R7_6.1 R7_7.1 R7_8.1 R7_9.1 R7_10.1 R7_11.1 R7_12.1 R7_13.1 R7_14.1 R7_15.1 R7_16.1 R7_17.1 R7_18.1 R7_19.1 R7_20.1 R7_21.1 R7_22.1 R7_23.1 R7_24.1 R7_25.1 R7_26.1 R7_27.1 R7_28.1 U6.1 | length 997.4
  Top Layer w0.5: R7_28.1@24.3,21.25 24.3,20.982 24.574,20.708 24.842,20.708 25.9,19.65 25.9,3 ; R7_1.1@24.3,88.85 25.1,88.85 25.75,89.5 25.75,107 ; R7_27.1@32.8,21.25 32.8,21.083 33.074,20.809 33.591,20.809 34.3,20.1 34.3,3 ; R7_2.1@32.8,88.85 33.6,88.85 34.25,89.5 34.25,107 ; R7_26.1@41.3,21.25 41.3,21.083 41.574,20.809 42.091,20.809 43.1,19.8 43.1,3 ; R7_3.1@41.3,88.85 42.1,88.85 42.75,89.5 42.75,107 ; R7_25.1@49.8,21.25 49.8,20.982 50.074,20.708 50.342,20.708 51.4,19.65 51.4,3 ; R7_4.1@49.8,88.85 50.6,88.85 51.25,89.5 51.25,107 ; R7_24.1@58.3,21.25 58.3,21.133 58.574,20.859 59.141,20.859 60,20 60,3 ; R7_5.1@58.3,88.85 59.1,88.85 59.75,89.5 59.75,107 ; R7_6.1@66.8,88.85 67.6,88.85 68.25,89.5 68.25,107 ; R7_22.1@75.3,21.25 75.3,20.982 75.574,20.708 75.842,20.708 76.7,19.85 76.7,3 ; R7_7.1@75.3,88.85 75.514,89.064 76.346,89.064 76.377,89.034 v1@76.72,89.034 ; R7_8.1@83.8,88.85 84.6,88.85 85.25,89.5 85.25,107 ; R7_20.1@92.3,21.25 92.3,20.982 92.574,20.708 92.842,20.708 93.8,19.75 93.8,3 ; R7_9.1@92.3,88.85 93.1,88.85 93.75,89.5 93.75,107 ; R7_18.1@109.3,21.25 109.3,20.982 109.574,20.708 109.842,20.708 110.7,19.85 110.7,3 ; R7_11.1@109.3,88.85 110.1,88.85 110.75,89.5 110.75,107 ; R7_16.1@126.3,21.25 126.3,20.982 126.574,20.708 126.592,20.708 127.9,19.4 127.9,3 ; R7_13.1@126.3,88.85 127.1,88.85 127.75,89.5 127.75,107
  Top Layer w1: CN1_28.5@22.637,3 25.9,3 CN1_27.5@31.137,3 34.3,3 CN1_26.5@39.637,3 43.1,3 CN1_25.5@48.137,3 51.4,3 CN1_24.5@56.637,3 60,3 CN1_23.5@65.137,3 67.958,3 ; FB6_8.1@66.2,30.95 66.475,30.95 66.5,30.975 66.5,32.1 v1(66.9,32.5) ; R7_23.1@66.8,21.25 66.8,21.275 66.825,21.3 v1(68.2,21.3) 68.35,21.15 68.35,3.392 67.958,3 ; R7_7.1@75.3,88.85 v1@76.65,88.85 ; v1(76.7,88.9) 76.805,89.005 76.805,107 ; v1(81.1,77) FB6_1.1@81.1,78.75 ; R7_21.1@83.8,21.25 85.35,21.25 ; v1(84.15,32.45) 84.15,30.975 84.175,30.95 FB6_7.1@84.2,30.95 ; v1(85.35,21.9) 85.35,21.25 ; v1(99.1,77) FB6_2.1@99.1,78.75 ; R7_19.1@100.8,21.25 102.308,21.25 ; R7_10.1@100.8,88.85 100.8,88.875 100.825,88.9 102.305,88.9 ; v1(102.15,32.3) 102.15,30.975 102.175,30.95 FB6_6.1@102.2,30.95 ; v1(102.3,88.1) 102.305,88.105 102.305,88.9 ; 102.3,107 102.3,93.766 102.305,93.761 102.305,88.9 ; v1(102.308,22.083) 102.308,21.25 ; v1(117.1,77) FB6_3.1@117.1,78.75 ; R7_17.1@117.8,21.25 119.308,21.25 ; R7_12.1@117.8,88.85 117.8,88.825 117.825,88.8 v1(119.2,88.8) 119.418,89.018 119.418,93.85 119.475,93.907 119.475,107 ; v1(119.3,22.125) 119.308,22.117 119.308,21.25 ; FB6_5.1@120.195,30.95 120.2,30.955 v1(120.2,32.3) ; U6.1@123.54,51 126.8,51 128.5,52.7 ; C44.1@128.5,54 128.5,52.7 ; R7_15.1@134.8,21.25 136.2,21.25 137.275,20.175 ; R7_14.1@134.8,88.85 137.475,88.85 137.725,89.1 ; FB6_4.1@135.1,78.75 v1(135.1,77) 137.525,77 137.725,77.2 ; 67.958,3 CN1_22.5@73.637,3 76.7,3 CN1_21.5@82.137,3 84.958,3 ; 84.958,3 85.35,3.392 85.35,21.25 ; 84.958,3 CN1_20.5@90.637,3 93.8,3 CN1_19.5@99.137,3 101.958,3 ; 101.958,3 102.308,3.35 102.308,21.25 ; 101.958,3 CN1_18.5@107.637,3 110.7,3 CN1_17.5@116.137,3 119.308,3 ; 119.308,3 119.308,21.25 ; 119.308,3 CN1_16.5@124.637,3 127.9,3 CN1_15.5@133.137,3 133.35,3 135.5,5.15 135.5,8.75 137.275,10.525 137.275,20.175 ; 128.5,52.7 130.2,51 C42.1@132.6,51 132.6,50.65 136.225,47.025 142.55,47.025 144.15,45.425 144.15,20.761 143.564,20.175 137.275,20.175
  Top Layer w2: CN1_1.5@21.587,107 25.75,107 34.25,107 42.75,107 51.25,107 59.75,107 68.25,107 76.805,107 85.25,107 93.75,107 102.3,107 110.75,107 119.475,107 127.75,107 CN1_14.5@132.087,107 132.187,106.9 133.007,106.9 134.875,105.032 134.875,97.3 137.725,94.45 137.725,89.1 137.725,77.2 v1(137.725,71.4) v1(137.725,70.35) ; D4.2@128.5,58.1 129.1,58.1 132.6,54.6 C42.1@132.6,51
  Bottom Layer w1: v1(66.9,32.5) 68.2,31.2 v1(68.2,21.3) ; v1(76.7,88.9) 77.2,89.4 80,89.4 81.1,88.3 v1(81.1,77) ; v1(84.15,32.45) 89.6,27 89.6,21.475 88.475,20.35 86.9,20.35 v1(85.35,21.9) ; v1(99.1,77) 99.1,84.9 v1(102.3,88.1) ; v1(102.15,32.3) 105.875,28.575 105.875,21.175 105.225,20.525 103.866,20.525 v1(102.308,22.083) ; v1(117.1,77) 117.1,85.2 119.2,87.3 v1(119.2,88.8) ; v1(119.3,22.125) 120.2,23.025 v1(120.2,32.3)
  Bottom Layer w2: C42.1@132.6,51 132.6,65.225 v1(137.725,70.35) v1(137.725,71.4)
+12_IN: D4.1 TR1.2 | length 9
  Top Layer w2: D4.1@128.5,65 TR1.2@137.5,65
GND: C2_1.2 C2_2.2 C2_3.2 C2_4.2 C2_5.2 C2_6.2 C2_7.2 C2_8.2 C2_9.2 C2_10.2 C2_11.2 C2_12.2 C2_13.2 C2_14.2 C2_15.2 C2_16.2 C2_17.2 C2_18.2 C2_19.2 C2_20.2 C2_21.2 C2_22.2 C2_23.2 C2_24.2 C2_25.2 C2_26.2 C2_27.2 C2_28.2 C42.2 C43.2 C44.2 C45.2 C46.2 CN1_1.2 CN1_2.2 CN1_3.2 CN1_4.2 CN1_5.2 CN1_6.2 CN1_7.2 CN1_8.2 CN1_9.2 CN1_10.2 CN1_11.2 CN1_12.2 CN1_13.2 CN1_14.2 CN1_15.2 CN1_16.2 CN1_17.2 CN1_18.2 CN1_19.2 CN1_20.2 CN1_21.2 CN1_22.2 CN1_23.2 CN1_24.2 CN1_25.2 CN1_26.2 CN1_27.2 CN1_28.2 NT1.2 R37.2 TR1.1 U6.2 ZD1_1.1 ZD1_2.1 ZD1_3.1 ZD1_4.1 ZD1_5.1 ZD1_6.1 ZD1_7.1 ZD1_8.1 ZD1_9.1 ZD1_10.1 ZD1_11.1 ZD1_12.1 ZD1_13.1 ZD1_14.1 ZD1_15.1 ZD1_16.1 ZD1_17.1 ZD1_18.1 ZD1_19.1 ZD1_20.1 ZD1_21.1 ZD1_22.1 ZD1_23.1 ZD1_24.1 ZD1_25.1 ZD1_26.1 ZD1_27.1 ZD1_28.1 | length 342.1
  Top Layer w0.3: C2_28.2@21.588,16.981 21.528,17.04 19.028,17.04 ZD1_28.1@18.968,17.1 18.968,13.819 22.287,10.5 CN1_28.2@22.637,10.5 ; CN1_1.2@21.587,99.5 21.237,99.5 18.968,97.231 ZD1_1.1@18.968,93.1 C2_1.2@21.591,93.1 ; C2_27.2@30.088,16.981 30.028,17.04 27.528,17.04 ZD1_27.1@27.468,17.1 27.468,13.819 30.787,10.5 CN1_27.2@31.137,10.5 ; CN1_2.2@30.087,99.5 29.737,99.5 27.468,97.231 ZD1_2.1@27.468,93.1 C2_2.2@30.091,93.1 ; C2_26.2@38.588,16.981 38.528,17.04 36.028,17.04 ZD1_26.1@35.968,17.1 35.968,13.819 39.287,10.5 CN1_26.2@39.637,10.5 ; CN1_3.2@38.587,99.5 38.237,99.5 35.968,97.231 ZD1_3.1@35.968,93.1 C2_3.2@38.591,93.1 ; CN1_4.2@47.087,99.5 46.737,99.5 44.468,97.231 ZD1_4.1@44.468,93.1 C2_4.2@47.091,93.1 ; C2_25.2@47.088,16.981 47.028,17.04 44.528,17.04 ZD1_25.1@44.468,17.1 44.468,13.819 47.787,10.5 CN1_25.2@48.137,10.5 ; CN1_5.2@55.587,99.5 55.237,99.5 52.968,97.231 ZD1_5.1@52.968,93.1 C2_5.2@55.591,93.1 ; C2_24.2@55.588,16.981 55.528,17.04 53.028,17.04 ZD1_24.1@52.968,17.1 52.968,13.819 56.287,10.5 CN1_24.2@56.637,10.5 ; CN1_6.2@64.087,99.5 63.737,99.5 61.468,97.231 ZD1_6.1@61.468,93.1 C2_6.2@64.091,93.1 ; C2_23.2@64.088,16.981 64.028,17.04 61.528,17.04 ZD1_23.1@61.468,17.1 61.468,13.819 64.787,10.5 CN1_23.2@65.137,10.5 ; CN1_7.2@72.587,99.5 72.237,99.5 69.968,97.231 ZD1_7.1@69.968,93.1 C2_7.2@72.591,93.1 ; C2_22.2@72.588,16.981 72.528,17.04 70.028,17.04 ZD1_22.1@69.968,17.1 69.968,13.819 73.287,10.5 CN1_22.2@73.637,10.5 ; CN1_8.2@81.087,99.5 80.737,99.5 78.468,97.231 ZD1_8.1@78.468,93.1 C2_8.2@81.091,93.1 ; C2_21.2@81.088,16.981 81.028,17.04 78.528,17.04 ZD1_21.1@78.468,17.1 78.468,13.819 81.787,10.5 CN1_21.2@82.137,10.5 ; CN1_9.2@89.587,99.5 89.237,99.5 86.968,97.231 ZD1_9.1@86.968,93.1 C2_9.2@89.591,93.1 ; C2_20.2@89.588,16.981 89.528,17.04 87.028,17.04 ZD1_20.1@86.968,17.1 86.968,13.819 90.287,10.5 CN1_20.2@90.637,10.5 ; CN1_10.2@98.087,99.5 97.737,99.5 95.468,97.231 ZD1_10.1@95.468,93.1 C2_10.2@98.091,93.1 ; C2_19.2@98.088,16.981 98.028,17.04 95.528,17.04 ZD1_19.1@95.468,17.1 95.468,13.819 98.787,10.5 CN1_19.2@99.137,10.5 ; CN1_11.2@106.587,99.5 106.237,99.5 103.968,97.231 ZD1_11.1@103.968,93.1 C2_11.2@106.591,93.1 ; C2_18.2@106.588,16.981 106.528,17.04 104.028,17.04 ZD1_18.1@103.968,17.1 103.968,13.819 107.287,10.5 CN1_18.2@107.637,10.5 ; v1(110.5,60.5) 110.525,60.475 112.175,60.475 R37.2@112.2,60.45 ; CN1_12.2@115.087,99.5 114.737,99.5 112.468,97.231 ZD1_12.1@112.468,93.1 C2_12.2@115.091,93.1 ; C2_17.2@115.088,16.981 115.028,17.04 112.528,17.04 ZD1_17.1@112.468,17.1 112.468,13.819 115.787,10.5 CN1_17.2@116.137,10.5 ; C2_16.2@123.588,16.981 123.528,17.04 121.028,17.04 ZD1_16.1@120.968,17.1 120.968,13.819 124.287,10.5 CN1_16.2@124.637,10.5 ; CN1_13.2@123.587,99.5 123.237,99.5 120.968,97.231 ZD1_13.1@120.968,93.1 C2_13.2@123.591,93.1 ; C2_15.2@132.088,16.981 132.028,17.04 129.528,17.04 ZD1_15.1@129.468,17.1 129.468,13.819 132.787,10.5 CN1_15.2@133.137,10.5 ; CN1_14.2@132.087,99.5 131.737,99.5 129.468,97.231 ZD1_14.1@129.468,93.1 C2_14.2@132.091,93.1
  Top Layer w1: C45.2@120.45,62.4 120.45,62.125 121.04,61.535 121.04,61 ; U6.2@121,51 121,54.18 ; NT1.2@123,62.5 123,61.586 122.414,61 121.04,61 ; C44.2@126.55,54 121.18,54 121,54.18 ; 121,54.18 121,57.36 C43.2@121.04,57.4 121.04,61
  Top Layer w2: TR1.1@137.5,59.92 137.5,51.1 C42.2@137.6,51
  Bottom Layer w0.3: v1(110.5,60.5) 119.5,60.5 121.04,58.96 C43.2@121.04,57.4
  other v1: 19,1.5 27.5,1.5 36,1.5 44.5,1.5 53,1.5 61.5,1.5 70,1.5 78.5,1.5 87,1.5 95.5,1.5 104,1.5 112.5,1.5 121,1.5 129.5,1.5 19,5 27.5,5 36,5 44.5,5 53,5 61.5,5 70,5 78.5,5 87,5 95.5,5 104,5 112.5,5 121,5 129.5,5 143.4,14.8 24,104.5 32.5,104.5 41,104.5 49.5,104.5 58,104.5 66.5,104.5 75,104.5 83.5,104.5 92,104.5 100.5,104.5 109,104.5 117.5,104.5 126,104.5 129.674,104.5 24,109 32.5,109 41,109 49.5,109 58,109 66.5,109 75,109 83.5,109 92,109 100.5,109 109,109 117.5,109 126,109 129.674,109
GND_MCU: BAT1.2 C1_1.2 C1_2.2 C1_3.2 C3.1 C4.2 C5.2 C8.2 C9.2 C10.2 C11.2 C12.2 C13.2 C14.2 C15.2 C16.2 C17.2 C18.2 C19.2 C20.2 C21.2 C22.2 C23.2 C24.2 C25.2 C26.2 C27.2 C28.2 C29.2 C30.2 C31.2 C32.2 C33.2 C34.2 C35.2 C36.2 C37.2 C38.2 C39.2 C40.2 C41.1 C47_1.1 C47_2.1 C47_3.1 C47_4.1 C47_5.1 C47_6.1 C47_7.1 C47_8.1 C48.2 C49.2 CN5.5 CN5.16 CN5.17 CN5.18 CN5.19 CN5.20 CN5.21 CN5.22 CN5.23 CN5.24 CN5.25 CN5.26 CN5.27 CN5.28 CN5.29 CN5.30 CN5.31 CN5.32 CN5.37 CN5.41 CN5.42 CN6.4 CN7.6 H2.3 LED3.2 NT1.1 Q3.1 R16.1 R17.1 R25.1 R26.1 R27.1 S1_1.1 S1_2.1 S1_3.1 S2.1 SB3.1 SB4.1 TP1.1 U1_1.8 U1_2.8 U1_3.8 U1_4.8 U1_5.8 U1_6.8 U1_7.8 U1_8.8 U2.1 U2.2 U2.3 U2.4 U2.7 U3.8 U3.12 U3.16 U3.28 U4.16 U4.31 U4.38 U4.51 U4.61 U4.83 U4.94 U4.107 U4.120 U4.130 U5.1 | length 246.4
  Top Layer w0.3: U3.16@2.76,54.46 4.24,54.46 8.25,50.45 C8.2@8.25,47 R16.1@8.25,44.4 C11.2@8.25,41.8 ; 3,80.7 CN5.32@5.415,80.7 ; 3,81.2 CN5.31@5.415,81.2 ; 3,81.7 CN5.30@5.415,81.7 ; 3,82.2 CN5.29@5.415,82.2 ; 3,82.7 CN5.28@5.415,82.7 ; 3,83.2 CN5.27@5.415,83.2 ; 3,83.7 CN5.26@5.415,83.7 ; 3,84.2 CN5.25@5.415,84.2 ; 3,84.7 CN5.24@5.415,84.7 ; 3,85.2 CN5.23@5.415,85.2 ; 3,85.7 CN5.22@5.415,85.7 ; 3,86.2 CN5.21@5.415,86.2 ; 3,86.7 CN5.20@5.415,86.7 8.103,86.7 8.153,86.75 10.241,86.75 10.8,86.191 10.8,84.15 11.675,83.275 C17.2@11.675,83 C13.2@11.675,80.4 ; 3,87.2 CN5.19@5.415,87.2 ; 3,87.7 CN5.18@5.415,87.7 ; 3,88.2 CN5.17@5.415,88.2 ; 3,88.7 CN5.16@5.415,88.7 ; CN5.37@5.415,78.2 3,78.2 2.9,78.3 ; CN5.5@5.415,94.2 2.9,94.2 ; C14.2@11.675,91.7 C16.2@11.675,94.3 C15.2@11.675,96.9 11.675,98.3 ; R25.1@11.875,66.6 11.888,66.612 11.888,68.588 Q3.1@11.9,68.6 ; R17.1@12.2,10.95 12.525,11.275 C5.2@12.525,13.2 ; C10.2@12.55,57 12.55,58.655 15.045,61.15 C35.2@15.045,61.3 ; C9.2@12.65,24 12.65,24.275 13.6,25.225 13.6,28.7 ; S1_1.1@14.8,85.5 C1_1.2@14.8,82.1 C1_2.2@14.8,75.3 C1_3.2@14.8,68.5 14.7,68.6 Q3.1@11.9,68.6 ; TP1.1@16.4,98.8 14.125,98.8 13.625,98.3 11.675,98.3 ; C18.2@43.5,80.6 S2.1@43.5,84.7 ; C4.2@52.5,25.45 52.836,25.45 53.516,24.77 U2.7@55.2,24.77 U2.2@60.6,24.77 ; U2.1@60.6,23.5 U2.2@60.6,24.77 ; U2.4@60.6,27.31 U2.3@60.6,26.04 U2.2@60.6,24.77 ; C47_8.1@68.775,30.95 69.081,31.256 69.466,31.256 71.647,33.437 72.248,33.437 72.41,33.6 U1_8.8@72.41,34.2 ; U1_1.8@74.79,75.5 74.79,76.032 74.952,76.194 75.72,76.194 78.227,78.7 C47_1.1@78.502,78.7 ; C47_7.1@86.775,30.95 87.081,31.256 87.466,31.256 89.647,33.437 90.248,33.437 90.41,33.6 U1_7.8@90.41,34.2 ; U1_2.8@92.79,75.5 92.79,76.032 92.952,76.194 93.72,76.194 96.227,78.7 C47_2.1@96.502,78.7 ; 100.4,50.5 102.975,50.5 104.025,49.45 C38.2@104.3,49.45 C39.2@106.9,49.45 ; C47_6.1@104.775,30.95 105.081,31.256 105.466,31.256 107.647,33.437 108.248,33.437 108.41,33.6 U1_6.8@108.41,34.2 ; U1_3.8@110.79,75.5 110.79,76.032 110.952,76.194 111.72,76.194 114.227,78.7 C47_3.1@114.502,78.7 ; U1_4.8@128.79,75.5 128.79,76.032 128.952,76.194 129.72,76.194 132.227,78.7 C47_4.1@132.502,78.7 ; 2.9,78.3 2.9,94.2 ; 2.9,78.3 CN5.42@2.9,74.6 2.9,63.231 3.284,62.847 7.05,62.847 7.925,63.722 R27.1@7.925,63.997 R26.1@7.925,66.6 7.925,68.525 8.85,69.45 11.05,69.45 Q3.1@11.9,68.6 ; 2.9,94.2 CN5.41@2.9,98.3 5.598,98.3 7.948,100.65 10.8,100.65 11.675,99.775 C12.2@11.675,99.5 11.675,98.3
  Top Layer w1: v1(123.7,65) 123.75,64.95 NT1.1@123.75,63.55 ; C49.2@132.6,44.35 C48.2@135.2,44.35
  other v1: 10.8,14.2 20.8,22 26.5,23.2 137,38.9 130.5,44.3 23.6,44.4 38.967,45.958 36.967,47.958 40.967,47.958 114.5,49.2 34.967,49.958 38.967,49.958 42.967,49.958 32.967,51.958 36.967,51.958 40.967,51.958 44.967,51.958 30.967,53.958 34.967,53.958 38.967,53.958 42.967,53.958 46.967,53.958 28.967,55.958 32.967,55.958 36.967,55.958 40.967,55.958 44.967,55.958 48.967,55.958 30.967,57.958 34.967,57.958 38.967,57.958 42.967,57.958 46.967,57.958 32.967,59.958 36.967,59.958 40.967,59.958 44.967,59.958 34.967,61.958 38.967,61.958 42.967,61.958 36.967,63.958 40.967,63.958 38.967,65.958 52.1,80.2 36.3,82.7
ISD_LED: R13.2 U3.2 | length 3.4
  Top Layer w0.3: R13.2@14.6,26.6 14.68,26.52 U3.2@18,26.52
ISD_MIC_N: C7.2 U3.11 | length 40.7
  Top Layer w0.3: C7.2@9.6,12.15 9.6,16.851 10.2,17.451 10.2,41.049 17.611,48.46 17.611,48.585 18,48.974 U3.11@18,49.38
ISD_MIC_P: C6.2 U3.10 | length 45.4
  Top Layer w0.3: C6.2@17.4,10.95 17.379,10.95 17.012,11.316 17.012,15.788 15.6,17.2 11.1,17.2 10.8,17.5 10.8,40.6 10.7,40.7 16.826,46.826 17.706,46.826 18,47.119 U3.10@18,46.84
ISD_MISO: U3.4 U4.75 | length 28.5
  Top Layer w0.3: U3.4@18,31.6 16.024,33.576 16.024,35.024 16.43,35.43 18.518,35.43 21.5,38.412 21.5,49.451 U4.75@25.992,53.943
ISD_MOSI: U3.5 U4.76 | length 22.9
  Top Layer w0.3: U3.5@18,34.14 22,38.14 22,49.244 U4.76@26.345,53.589
ISD_SCK: U3.6 U4.74 | length 20.8
  Top Layer w0.3: U3.6@18,36.68 21,39.68 21,49.658 U4.74@25.638,54.296
ISD_SS: U3.7 U4.73 | length 18.4
  Top Layer w0.3: U3.7@18,39.22 20.5,41.72 20.5,49.865 U4.73@25.285,54.65
LED1: CN1_1.4 R33_1.1 U1_1.15 | length 69.7
  Top Layer w0.3: U1_1.15@67.17,80.7 67.17,83.474 68.196,84.5 R33_1.1@68.471,84.5 ; v1@67.183,78.713 U1_1.15@67.183,80.687
  Bottom Layer w0.3: CN1_1.4@21.587,104.5 21.937,104.5 25.59,100.847 25.59,100.517 28.487,97.62 28.487,96.219 28.956,95.75 30.357,95.75 35.707,90.4 65.664,90.4 67.195,88.869 v1(67.195,78.7)
LED2: CN1_2.4 R35_1.1 U1_1.13 | length 67.9
  Top Layer w0.3: U1_1.13@69.71,80.7 69.71,81.388 72.517,84.194 73.217,84.194 R35_1.1@73.523,84.5 ; U1_1.13@69.733,80.677 69.755,80.655 69.755,78.045 v1(69.8,78)
  Bottom Layer w0.3: CN1_2.4@30.087,104.5 30.437,104.5 34.09,100.847 34.09,100.117 35.6,98.607 35.6,94.676 38.876,91.4 66.079,91.4 70.1,87.379 70.1,82.498 69.755,82.153 69.755,78.045 v1(69.8,78)
LED3: CN1_3.4 R38_1.1 U1_1.11 | length 62.3
  Top Layer w0.3: U1_1.11@72.25,80.7 72.25,81.388 73.662,82.8 76.599,82.8 78.299,84.5 R38_1.1@78.574,84.5 ; U1_1.11@72.273,80.677 72.295,80.655 72.295,78.045 v1(72.34,78)
  Bottom Layer w0.3: CN1_3.4@38.587,104.5 38.937,104.5 40.937,102.5 41.007,102.5 45.487,98.02 45.487,95.313 48.4,92.4 66.493,92.4 71.1,87.793 71.1,80.388 72.34,79.148 v1(72.34,78)
LED4: CN1_4.4 R32_2.1 U1_2.16 | length 53.3
  Top Layer w0.3: U1_2.16@83.9,80.7 83.9,84.455 R32_2.1@83.945,84.5
  Bottom Layer w0.3: CN1_4.4@47.087,104.5 47.437,104.5 51.565,100.372 51.565,98.641 56.806,93.4 77.6,93.4 83.895,87.105 v1(83.895,82.7)
LED5: CN1_5.4 R34_2.1 U1_2.14 | length 49.5
  Top Layer w0.3: U1_2.14@86.44,80.7 86.44,82.15 87.09,82.8 v1(87.2,82.8) 87.2,82.917 88.783,84.5 R34_2.1@88.997,84.5
  Bottom Layer w0.3: CN1_5.4@55.587,104.5 57.087,103 59.8,103 60.8,102 60.8,97.906 64.306,94.4 78.014,94.4 87.2,85.214 v1(87.2,82.8)
LED6: CN1_6.4 R36_2.1 U1_2.12 | length 49.5
  Top Layer w0.3: U1_2.12@88.98,80.7 88.98,81.388 90.893,83.3 92.573,83.3 93.773,84.5 R36_2.1@94.048,84.5 ; v1@88.988,78.708 U1_2.12@88.988,80.692
  Bottom Layer w0.3: CN1_6.4@64.087,104.5 64.437,104.5 69.3,99.637 69.3,97.494 71.394,95.4 78.428,95.4 88.995,84.833 v1(88.995,78.7)
LED7: CN1_7.4 R39_2.1 U1_2.10 | length 45.4
  Top Layer w0.3: v1@91.508,78.712 U1_2.10@91.508,80.688 ; U1_2.10@91.52,80.7 91.52,81.384 92.436,82.3 96.625,82.3 98.825,84.5 R39_2.1@99.1,84.5
  Bottom Layer w0.3: CN1_7.4@72.587,104.5 72.937,104.5 75.75,101.687 75.75,99.493 91.495,83.748 v1(91.495,78.7)
LED8: CN1_8.4 R33_3.1 U1_3.15 | length 53.7
  Top Layer w0.3: U1_3.15@103.17,80.7 103.17,83.474 104.196,84.5 R33_3.1@104.471,84.5 ; v1@103.183,78.713 U1_3.15@103.183,80.687
  Bottom Layer w0.3: CN1_8.4@81.087,104.5 81.437,104.5 86.4,99.537 86.4,96.6 90,93 104.7,93 107.4,90.3 107.4,86.4 103.195,82.195 v1(103.195,78.7)
LED9: CN1_9.4 R35_3.1 U1_3.13 | length 48.2
  Top Layer w0.3: U1_3.13@105.71,80.7 105.71,81.388 108.517,84.194 109.217,84.194 R35_3.1@109.523,84.5 ; U1_3.13@105.733,80.677 105.755,80.655 105.755,78.045 v1(105.8,78)
  Bottom Layer w0.3: CN1_9.4@89.587,104.5 90,104.5 94.9,99.6 94.9,97.321 98.021,94.2 104.914,94.2 108.4,90.714 108.4,83.9 105.755,81.255 105.755,78.045 v1(105.8,78)
LED10: CN1_10.4 R38_3.1 U1_3.11 | length 43.1
  Top Layer w0.3: U1_3.11@108.25,80.7 108.25,81.388 109.663,82.8 112.599,82.8 114.299,84.5 R38_3.1@114.574,84.5 ; U1_3.11@108.273,80.677 108.295,80.655 108.295,78.045 v1(108.34,78)
  Bottom Layer w0.3: CN1_10.4@98.087,104.5 98.8,104.5 104.1,99.2 104.1,96.428 109.4,91.128 109.4,80.398 108.295,79.293 108.295,78.045 v1(108.34,78)
LED11: CN1_11.4 R32_4.1 U1_4.16 | length 39.2
  Top Layer w0.3: U1_4.16@119.9,80.7 119.9,84.455 R32_4.1@119.945,84.5
  Bottom Layer w0.3: CN1_11.4@106.587,104.5 106.937,104.5 110.5,100.937 110.5,96 113.623,92.877 121.015,92.877 124.1,89.793 124.1,86.905 v1(119.895,82.7)
LED12: CN1_12.4 R34_4.1 U1_4.14 | length 32.1
  Top Layer w0.3: U1_4.14@122.44,80.7 122.44,82.15 123.09,82.8 v1(123.2,82.8) 123.2,82.917 124.783,84.5 R34_4.1@124.997,84.5
  Bottom Layer w0.3: CN1_12.4@115.087,104.5 115.437,104.5 117.8,102.137 117.8,97.507 125.3,90.007 125.3,84.9 v1(123.2,82.8)
LED13: CN1_13.4 R36_4.1 U1_4.12 | length 37.5
  Top Layer w0.3: U1_4.12@124.98,80.7 124.98,81.388 126.892,83.3 128.573,83.3 129.773,84.5 R36_4.1@130.048,84.5 ; v1@124.988,78.708 U1_4.12@124.988,80.692
  Bottom Layer w0.3: CN1_13.4@123.587,104.5 123.937,104.5 127.3,101.137 127.3,90.193 126.495,89.388 126.495,83.088 124.995,81.588 v1(124.995,78.7)
LED14: CN1_14.4 R39_4.1 U1_4.10 | length 41.6
  Top Layer w0.3: v1@127.508,78.712 U1_4.10@127.508,80.688 ; U1_4.10@127.52,80.7 127.52,81.384 128.436,82.3 132.625,82.3 134.825,84.5 R39_4.1@135.1,84.5
  Bottom Layer w0.3: v1(127.495,78.7) 127.495,88.895 134.9,96.3 134.9,100.6 134,101.5 134,102.587 CN1_14.4@132.087,104.5
LED15: CN1_15.4 R33_5.1 U1_5.15 | length 34.4
  Top Layer w0.3: R33_5.1@132.77,25.5 132.984,25.5 133.351,25.866 133.351,26.081 134.025,26.755 U1_5.15@134.025,29 134.013,29.013 134.013,30.987 v1(134,31)
  Bottom Layer w0.3: CN1_15.4@133.137,5.5 132.787,5.5 130.5,7.787 130.5,22.7 133.5,25.7 133.5,30.474 134,30.974 v1(134,31)
LED16: CN1_16.4 R35_5.1 U1_5.13 | length 38.9
  Top Layer w0.3: R35_5.1@127.72,25.5 128,25.5 129.494,26.994 130.166,26.994 131.485,28.313 U1_5.13@131.485,29 ; U1_5.13@131.495,29.055 131.49,29.06 131.49,31.695 v1(131.495,31.7)
  Bottom Layer w0.3: CN1_16.4@124.637,5.5 124.987,5.5 130,10.513 130,23.6 133,26.6 133,30.44 132.437,31.003 132.192,31.003 v1(131.495,31.7)
LED17: CN1_17.4 R38_5.1 U1_5.11 | length 47.3
  Top Layer w0.3: R38_5.1@122.67,25.5 122.945,25.5 124.425,26.98 127.371,26.98 128.545,28.154 128.783,28.154 128.945,28.316 U1_5.11@128.945,29 128.95,29.005 128.95,31.695 v1(128.955,31.7)
  Bottom Layer w0.3: CN1_17.4@116.137,5.5 115.787,5.5 113.4,7.887 113.4,13.631 115.069,15.3 119.257,15.3 128.2,24.243 128.2,25.007 128.955,25.762 v1(128.955,31.7)
LED18: CN1_18.4 R32_6.1 U1_6.16 | length 31.1
  Top Layer w0.3: U1_6.16@117.3,29 117.3,25.505 R32_6.1@117.305,25.5
  Bottom Layer w0.3: CN1_18.4@107.637,5.5 107.287,5.5 105.3,7.487 105.3,14.222 114.505,23.427 114.505,24.2 v1(117.305,27)
LED19: CN1_19.4 R34_6.1 U1_6.14 | length 34
  Top Layer w0.3: R34_6.1@112.25,25.5 112.525,25.5 114.601,27.576 114.601,28.841 U1_6.14@114.76,29
  Bottom Layer w0.3: CN1_19.4@99.137,5.5 102,5.5 104.8,8.3 104.8,14.429 114.005,23.634 v1(114.005,27)
LED20: CN1_20.4 R36_6.1 U1_6.12 | length 53.9
  Top Layer w0.3: R36_6.1@107.2,25.5 107.475,25.5 108.455,26.48 109.583,26.48 110.597,27.494 111.401,27.494 112.22,28.313 U1_6.12@112.22,29 112.212,29.008 112.212,30.992 v1(112.205,31)
  Bottom Layer w0.3: CN1_20.4@90.637,5.5 90.987,5.5 94.64,9.153 94.64,11.64 98.1,15.1 102.1,15.1 102.557,15.1 104.057,15.1 112.25,23.293 112.25,24.793 112.25,27.243 114.6,29.593 114.6,32.7 114.3,33 112.8,33 112.205,32.405 v1(112.205,31)
LED21: CN1_21.4 R39_6.1 U1_6.10 | length 56.6
  Top Layer w0.3: R39_6.1@102.15,25.5 102.425,25.5 104.405,27.48 108.847,27.48 109.68,28.313 U1_6.10@109.68,29 109.692,29.012 109.692,30.988 v1(109.705,31)
  Bottom Layer w0.3: CN1_21.4@82.137,5.5 82.487,5.5 87.1,10.113 87.1,13.35 88.45,14.7 90.736,14.7 94.536,18.5 106,18.5 109.705,22.205 v1(109.705,31)
LED22: CN1_22.4 R33_7.1 U1_7.15 | length 48.5
  Top Layer w0.3: R33_7.1@96.775,25.5 96.989,25.5 97.356,25.866 97.356,26.081 98.03,26.755 U1_7.15@98.03,29 98.017,29.013 98.017,30.987 v1(98.005,31)
  Bottom Layer w0.3: CN1_22.4@73.637,5.5 73.987,5.5 77.9,9.413 77.9,11.4 82.2,15.7 90.321,15.7 100.155,25.534 100.155,28.85 v1(98.005,31)
LED23: CN1_23.4 R35_7.1 U1_7.13 | length 57.9
  Top Layer w0.3: R35_7.1@91.725,25.5 92.005,25.5 93.499,26.994 94.171,26.994 95.49,28.313 U1_7.13@95.49,29 ; U1_7.13@95.467,29.023 95.5,29.055 95.495,29.06 95.495,31.695 v1(95.5,31.7)
  Bottom Layer w0.3: CN1_23.4@65.137,5.5 65.487,5.5 71.5,11.513 71.5,14.017 72.083,14.6 79.686,14.6 81.786,16.7 89.907,16.7 97,23.793 97,30.445 96.439,31.006 96.194,31.006 v1(95.5,31.7)
LED24: CN1_24.4 R38_7.1 U1_7.11 | length 69.4
  Top Layer w0.3: R38_7.1@86.675,25.5 86.95,25.5 88.43,26.98 91.376,26.98 92.55,28.154 92.788,28.154 92.95,28.316 U1_7.11@92.95,29 92.955,29.005 92.955,31.695 v1(92.96,31.7)
  Bottom Layer w0.3: CN1_24.4@56.637,5.5 56.287,5.5 55.037,6.75 55.037,11.018 55.769,11.75 59.405,11.75 63.755,16.1 79.064,16.1 81.214,18.25 89.293,18.25 92.96,21.917 v1(92.96,31.7)
LED25: CN1_25.4 R32_8.1 U1_8.16 | length 54
  Top Layer w0.3: U1_8.16@81.3,29 81.3,25.505 R32_8.1@81.305,25.5
  Bottom Layer w0.3: CN1_25.4@48.137,5.5 47.787,5.5 45.3,7.987 45.3,12.606 47.694,15 61.24,15 63.34,17.1 70.7,17.1 80.581,26.981 81.286,26.981 v1(81.305,27)
LED26: CN1_26.4 R34_8.1 U1_8.14 | length 61.4
  Top Layer w0.3: R34_8.1@76.25,25.5 76.525,25.5 78.601,27.576 78.601,28.841 U1_8.14@78.76,29
  Bottom Layer w0.3: CN1_26.4@39.637,5.5 39.287,5.5 37.4,7.387 37.4,14.586 38.814,16 60.826,16 62.926,18.1 70.286,18.1 78.005,25.819 v1(78.005,27)
LED27: CN1_27.4 R36_8.1 U1_8.12 | length 77.3
  Top Layer w0.3: R36_8.1@71.2,25.5 71.475,25.5 72.455,26.48 73.583,26.48 74.597,27.494 75.401,27.494 76.22,28.313 U1_8.12@76.22,29 76.212,29.008 76.212,30.992 v1(76.205,31)
  Bottom Layer w0.3: CN1_27.4@31.137,5.5 31.487,5.5 36.8,10.813 36.8,14.693 38.607,16.5 60.619,16.5 62.719,18.6 69.971,18.6 74.705,23.334 74.705,25.098 78.8,29.193 78.8,32.4 78.2,33 76.9,33 76.205,32.305 v1(76.205,31)
LED28: CN1_28.4 R39_8.1 U1_8.10 | length 78.3
  Top Layer w0.3: R39_8.1@66.15,25.5 66.425,25.5 68.405,27.48 72.847,27.48 73.68,28.313 U1_8.10@73.68,29 73.692,29.012 73.692,30.988 v1(73.705,31)
  Bottom Layer w0.3: CN1_28.4@22.637,5.5 22.987,5.5 26.64,9.153 26.64,10.884 33.256,17.5 60.205,17.5 62.305,19.6 69.557,19.6 73.705,23.748 v1(73.705,31)
MCU_BOOT0: H2.2 U4.138 | length 28.4
  Top Layer w0.3: U4.138@50.528,52.528 51.897,51.16 55.26,51.16 55.6,51.5 v1(56.3,51.5)
  Bottom Layer w0.3: H2.2@55.7,29.8 55.7,40.458 56.3,41.058 v1(56.3,51.5)